# EAGLE board carsensors (EAGLE 4.16)
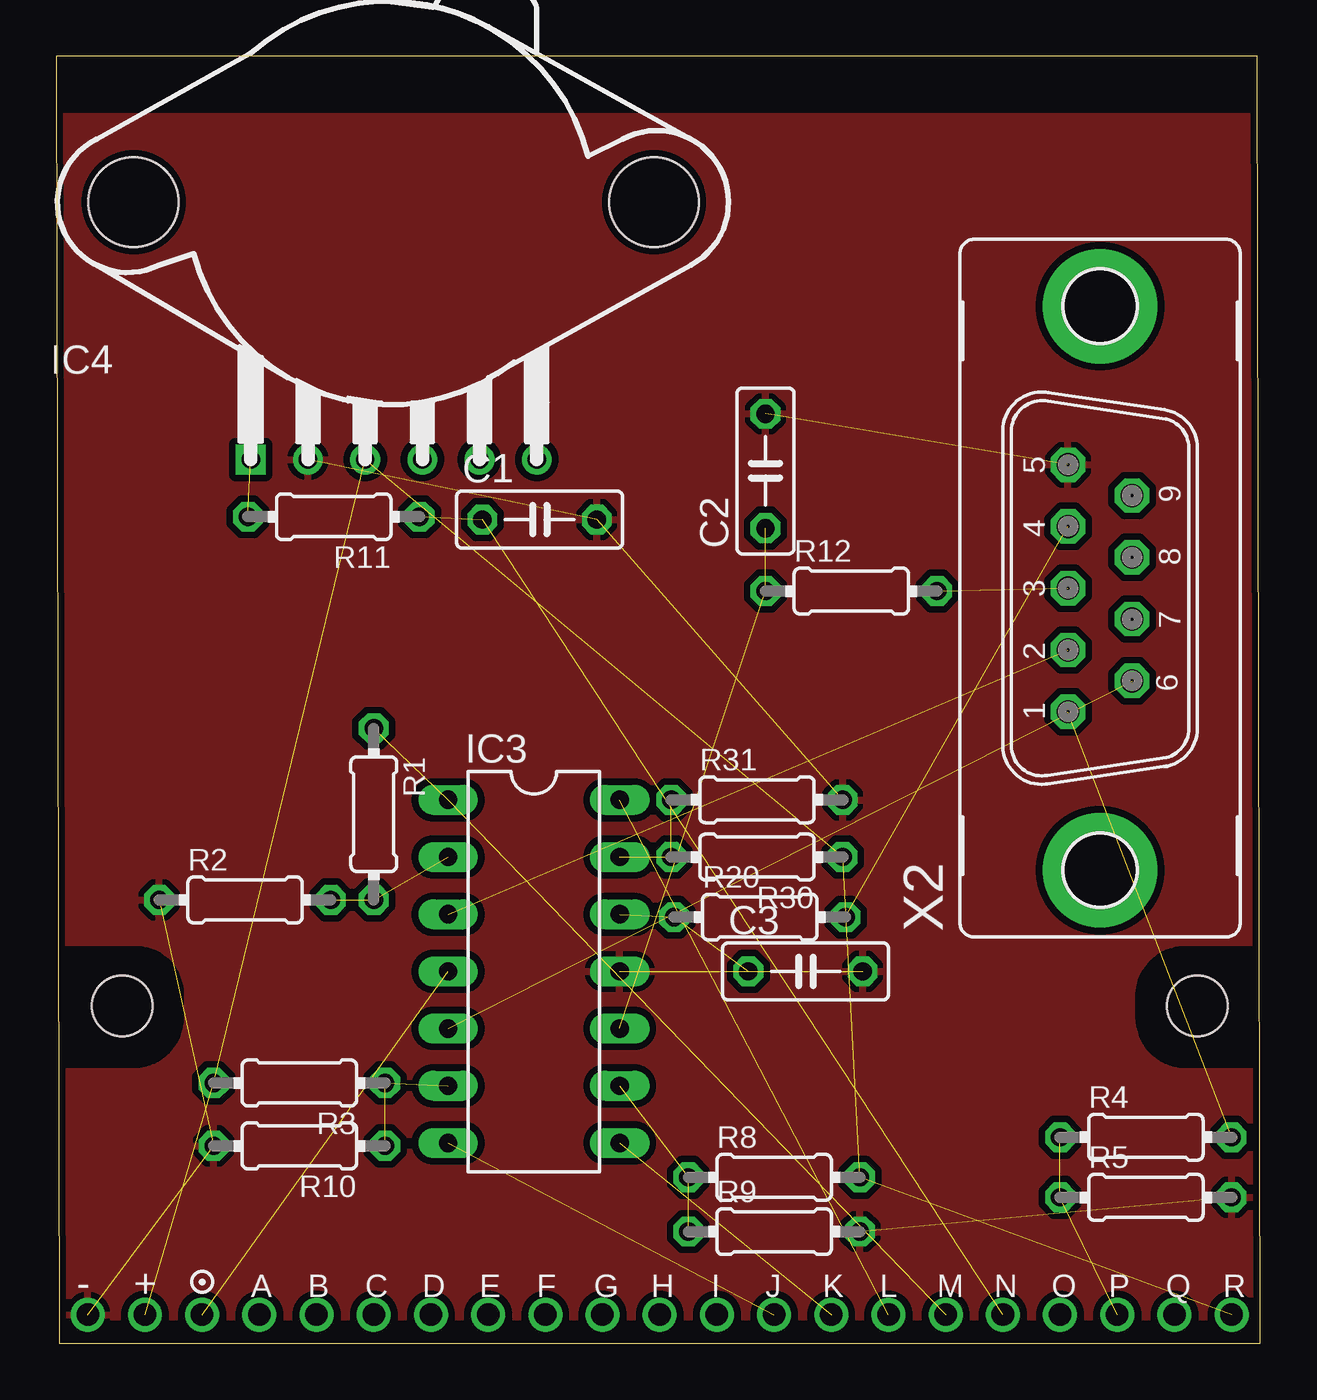
[diagram p0: board, top side]

Size 53.47 x 57.15 mm. Coordinates in mm from the lower left corner, seen from the top.
Outline: 0.13,0 53.47,0 53.34,57.15 0,57.15 0.13,0
Copper layers (1*16): Top 0.035mm / dielectric 1.5mm / Bottom 0.035mm
Design rules "default": minimum track width 10mil, minimum drill 0.6mm, track to track 10mil, track to pad 10mil, pad to pad 10mil, via to via 10mil, smd to smd 8mil, copper to edge 10mil, drill to drill 8mil, minimum pad ring 10mil, minimum via ring 10mil, stop-mask expansion 4mil, vias tented up to drill 0mil, thermal gap 10mil
Holes 2.7 mm at 50.67,14.99 2.92,14.99

## Footprints (pad centres in the part's own frame; a part is rotated, then mirrored left to right if it is on the bottom)
C050-025X075 = drill 0.813 octagon: 1 -2.54,0; 2 2.54,0
DIL14 = drill 0.813 long: 1 -7.62,-3.81; 2 -5.08,-3.81; 3 -2.54,-3.81; 4 0,-3.81; 5 2.54,-3.81; 6 5.08,-3.81; 7 7.62,-3.81; 8 7.62,3.81; 9 5.08,3.81; 10 2.54,3.81; 11 0,3.81; 12 -2.54,3.81; 13 -5.08,3.81; 14 -7.62,3.81
MPX4000GPH = drill 0.813 square: 1 -6.35,-11.43 | drill 0.813 round: 2 -3.81,-11.43; 3 -1.27,-11.43; 4 1.27,-11.43; 5 3.81,-11.43; 6 6.35,-11.43 | hole 4: 11.555,0; -11.555,0
0204/7 = drill 0.813 octagon: 1 -3.81,0; 2 3.81,0
M09VP = drill 1.016 octagon: 1 -5.486,1.422; 2 -2.743,1.422; 3 0,1.422; 4 2.743,1.422; 5 5.486,1.422; 6 -4.115,-1.422; 7 -1.372,-1.422; 8 1.372,-1.422; 9 4.115,-1.422 | drill 3.302 pad 5.08 round: G1 -12.522,0; G2 12.522,0
CORE_IOHEAD_NOSILC = drill 1 round: 1 25.4,0; 2 22.86,0; 3 20.32,0; 4 17.78,0; 5 15.24,0; 6 12.7,0; 7 10.16,0; 8 7.62,0; 9 5.08,0; 10 2.54,0; 11 0,0; 12 -2.54,0; 13 -5.08,0; 14 -7.62,0; 15 -10.16,0; 16 -12.7,0; 17 -15.24,0; 18 -17.78,0; 19 -20.32,0; 20 -22.86,0; 21 -25.4,0

## Placement (x,y rotation side)
C1  [C050-025X075]  21.46,36.58 0 top
C2  [C050-025X075]  31.5,38.73 90 top
C3  [C050-025X075]  33.27,16.51 0 top
IC3  LM324N  [DIL14]  21.21,16.51 270 top
IC4  MPX4115AP  [MPX4000GPH]  14.99,50.67 0 top
R1  [0204/7]  14.1,23.5 270 top
R2  [0204/7]  8.38,19.68 0 top
R3  [0204/7]  10.79,11.56 180 top
R4  [0204/7]  48.39,9.14 0 top
R5  [0204/7]  48.39,6.48 0 top
R8  [0204/7]  31.88,7.37 0 top
R9  [0204/7]  31.88,4.95 0 top
R10  [0204/7]  10.79,8.76 180 top
R11  [0204/7]  12.32,36.7 180 top
R12  [0204/7]  35.31,33.4 0 top
R20  [0204/7]  31.24,18.92 0 top
R30  [0204/7]  31.11,21.59 180 top
R31  [0204/7]  31.11,24.13 0 top
X2  [M09VP]  46.36,33.53 90 top
X3  CORE_IOHEADEXP  [CORE_IOHEAD_NOSILC]  26.8,1.27 0 bottom

## Library data of the parts
C1-C3 R1-R5 R8-R12 R20 R30 R31 = rcl
IC3 = linear
IC4 = motorola-sensor-driver
X2 = con-subd
X3 = expboard

## Nets
BOOST: C1.1 R11.1 X3.17
CBUT1: X2.7
CBUT2: X2.8
CBUT3: X2.9
EXP_A: X3.4
EXP_B: X3.5
EXP_C: X3.6
EXP_D: X3.7
EXP_E: X3.8
EXP_F: X3.9
EXP_G: X3.10
EXP_H: X3.11
EXP_I: X3.12
EXP_J: IC3.7 X3.13
EXP_K: IC3.8 X3.14
EXP_L: IC3.14 X3.15
EXP_M: IC3.1 R1.1 X3.16
EXP_O: X3.18
EXP_P: R4.1 R5.1 X3.19
EXP_Q: X3.20
GND: C1.2 C2.2 C3.2 IC3.11 IC4.2 R2.1 R5.2 R9.2 R10.2 R31.2 X2.5 X3.1
INJECTOR: IC3.5 X2.6
LAMBDA: IC3.3 X2.2
N$2: IC3.2 R1.2 R2.2
N$3: C3.1 IC3.12 R20.1
N$6: IC3.6 R3.1 R10.1
N$7: IC3.9 R8.1 R9.1
N$8: IC4.1 R11.2
N$10: IC3.13 R30.2 R31.1
N$13: C2.1 IC3.10 R12.1
ROADSPEED: R20.2 X2.4
RPMIN: R12.2 X2.3
V_CAN: IC3.4 X3.3
VCAR: R4.2 X2.1
VCC: IC4.3 R3.2 R8.2 R30.1 X3.2 X3.21

## Tracks (layer width: path | path; a pad name or v marks a point on that pad's centre or on a via)
BOOST  (2 unrouted)
EXP_J  (1 unrouted)
EXP_K  (1 unrouted)
EXP_L  (1 unrouted)
EXP_M  (2 unrouted)
EXP_P  (2 unrouted)
GND  (7 unrouted)
  pour Top (isolate 0.305, rank 3): 0.13,54.48 53.47,54.48 53.47,17.78 50.16,17.78 arc90 47.75,15.49 47.75,14.48 arc90 50.16,12.06 53.47,12.06 53.47,1.14 0.13,1.14 0.13,12.06 3.43,12.06 arc90 5.84,14.48 5.84,15.49 arc90 3.56,17.78 0.13,17.78
INJECTOR  (1 unrouted)
LAMBDA  (1 unrouted)
N$2  (2 unrouted)
N$3  (2 unrouted)
N$6  (2 unrouted)
N$7  (2 unrouted)
N$8  (1 unrouted)
N$10  (2 unrouted)
N$13  (2 unrouted)
ROADSPEED  (1 unrouted)
RPMIN  (1 unrouted)
V_CAN  (1 unrouted)
VCAR  (1 unrouted)
VCC  (5 unrouted)

## Text on the board
tPlace: - | + | A | B | C | D | E | F | G | H | I | J | K | L | M | N | O | P | Q | R
Document: Top is component side | Expansion will be mounted bottom to bottom with CoreCard | Change vertical dimension to fit | Remove I/O-header silcscreen if neccesary | Remove mounting holes if neccesary